# EAGLE board Copy of Lab 4.2. Watchdog (EAGLE 9.7.0)

Size 121.2 x 134.65 mm. Coordinates in mm from the lower left corner, seen from the top.
Outline: 0,0 121.2,0 121.2,134.65 0,134.65 0,0
Copper layers (1*16): Top 0.035mm / dielectric 1.5mm / Bottom 0.035mm
Design rules "default": minimum track width 6mil, minimum drill 0.35mm, track to track 6mil, track to pad 6mil, pad to pad 6mil, via to via 6mil, smd to smd 6mil, copper to edge 40mil, drill to drill 6mil, minimum pad ring 10mil, minimum via ring 8mil, stop-mask expansion 4mil, vias tented up to drill 0mil, thermal gap 10mil

## Footprints (pad centres in the part's own frame; a part is rotated, then mirrored left to right if it is on the bottom)
RESAD1016W63L850D250B = drill 0.83 pad 1.43: 1 -5.08,0; 2 5.08,0
SWITCH-SPDT-PTH-8.5X3.7MM = drill 1.016 pad 1.88: 1 -2.54,0; 2 0,0; 3 2.54,0
ARDUINO-UNO-R3-SHIELD = drill 1.016 pad 1.88: 3.3V 24.13,-2.54; 5V 24.13,0; A0 24.13,12.7; A1 24.13,15.24; A2 24.13,17.78; A3 24.13,20.32; A4 24.13,22.86; A5 24.13,25.4; AREF -24.13,-13.97; D2 -24.13,20.32; D3 -24.13,17.78; D4 -24.13,15.24; D5 -24.13,12.7; D6 -24.13,10.16; D7 -24.13,7.62; D8 -24.13,3.81; D9 -24.13,1.27; D10 -24.13,-1.27; D11 -24.13,-3.81; D12 -24.13,-6.35; D13 -24.13,-8.89; GND@0 24.13,2.54; GND@1 24.13,5.08; GND@2 -24.13,-11.43; IOREF 24.13,-7.62; NC 24.13,-10.16; RES 24.13,-5.08; RX -24.13,25.4; SCL -24.13,-19.05; SDA -24.13,-16.51; TX -24.13,22.86; VIN 24.13,7.62

## Placement (x,y rotation side)
R1  5k  [RESAD1016W63L850D250B]  86.93,65.56 90 top
R2  5k  [RESAD1016W63L850D250B]  89.47,65.56 90 top
R4  10k  [RESAD1016W63L850D250B]  114.87,85.88 90 top
S1  TOGGLE  [SWITCH-SPDT-PTH-8.5X3.7MM]  112.33,70.64 180 top
UMASTER1  ARDUINO-UNO-R3-SHIELD  [ARDUINO-UNO-R3-SHIELD]  47.88,104.81 270 top
UWATCHDOG  ARDUINO-UNO-R3-SHIELD  [ARDUINO-UNO-R3-SHIELD]  49.49,29.84 270 top

## Library data of the parts
R1 R2 R4 S1 UMASTER1 UWATCHDOG = Tinkercad

## Nets
UMASTER1_3.3V: S1.2 UMASTER1.3.3V
UMASTER1_D2: R1.2 UMASTER1.D2
UMASTER1_D3: R4.1 S1.1 UMASTER1.D3
UMASTER1_D4: R2.2 UMASTER1.D4
UWATCHDOG_D2: R1.1 UWATCHDOG.D2
UWATCHDOG_D3: R2.1 UWATCHDOG.D3
UWATCHDOG_GND: R4.2 UMASTER1.GND@0 UMASTER1.GND@1 UMASTER1.GND@2 UWATCHDOG.GND@0 UWATCHDOG.GND@1 UWATCHDOG.GND@2

## Tracks (layer width: path | path; a pad name or v marks a point on that pad's centre or on a via)
UMASTER1_3.3V  (1 unrouted)
UMASTER1_D2  (1 unrouted)
UMASTER1_D3  (2 unrouted)
UMASTER1_D4  (1 unrouted)
UWATCHDOG_D2  (1 unrouted)
UWATCHDOG_D3  (1 unrouted)
UWATCHDOG_GND  (6 unrouted)